# Altium PCB CET-124-120W_pnp.PcbDoc (part 1 of 2)
Units mm, origin at the board's own origin, x right, y up, seen from the top; angles counter-clockwise.
Board outline 250 x 140 mm, 2 copper layers (Top Layer, Bottom Layer); 186 components, 165 nets, 1267 pads, 0 vias.
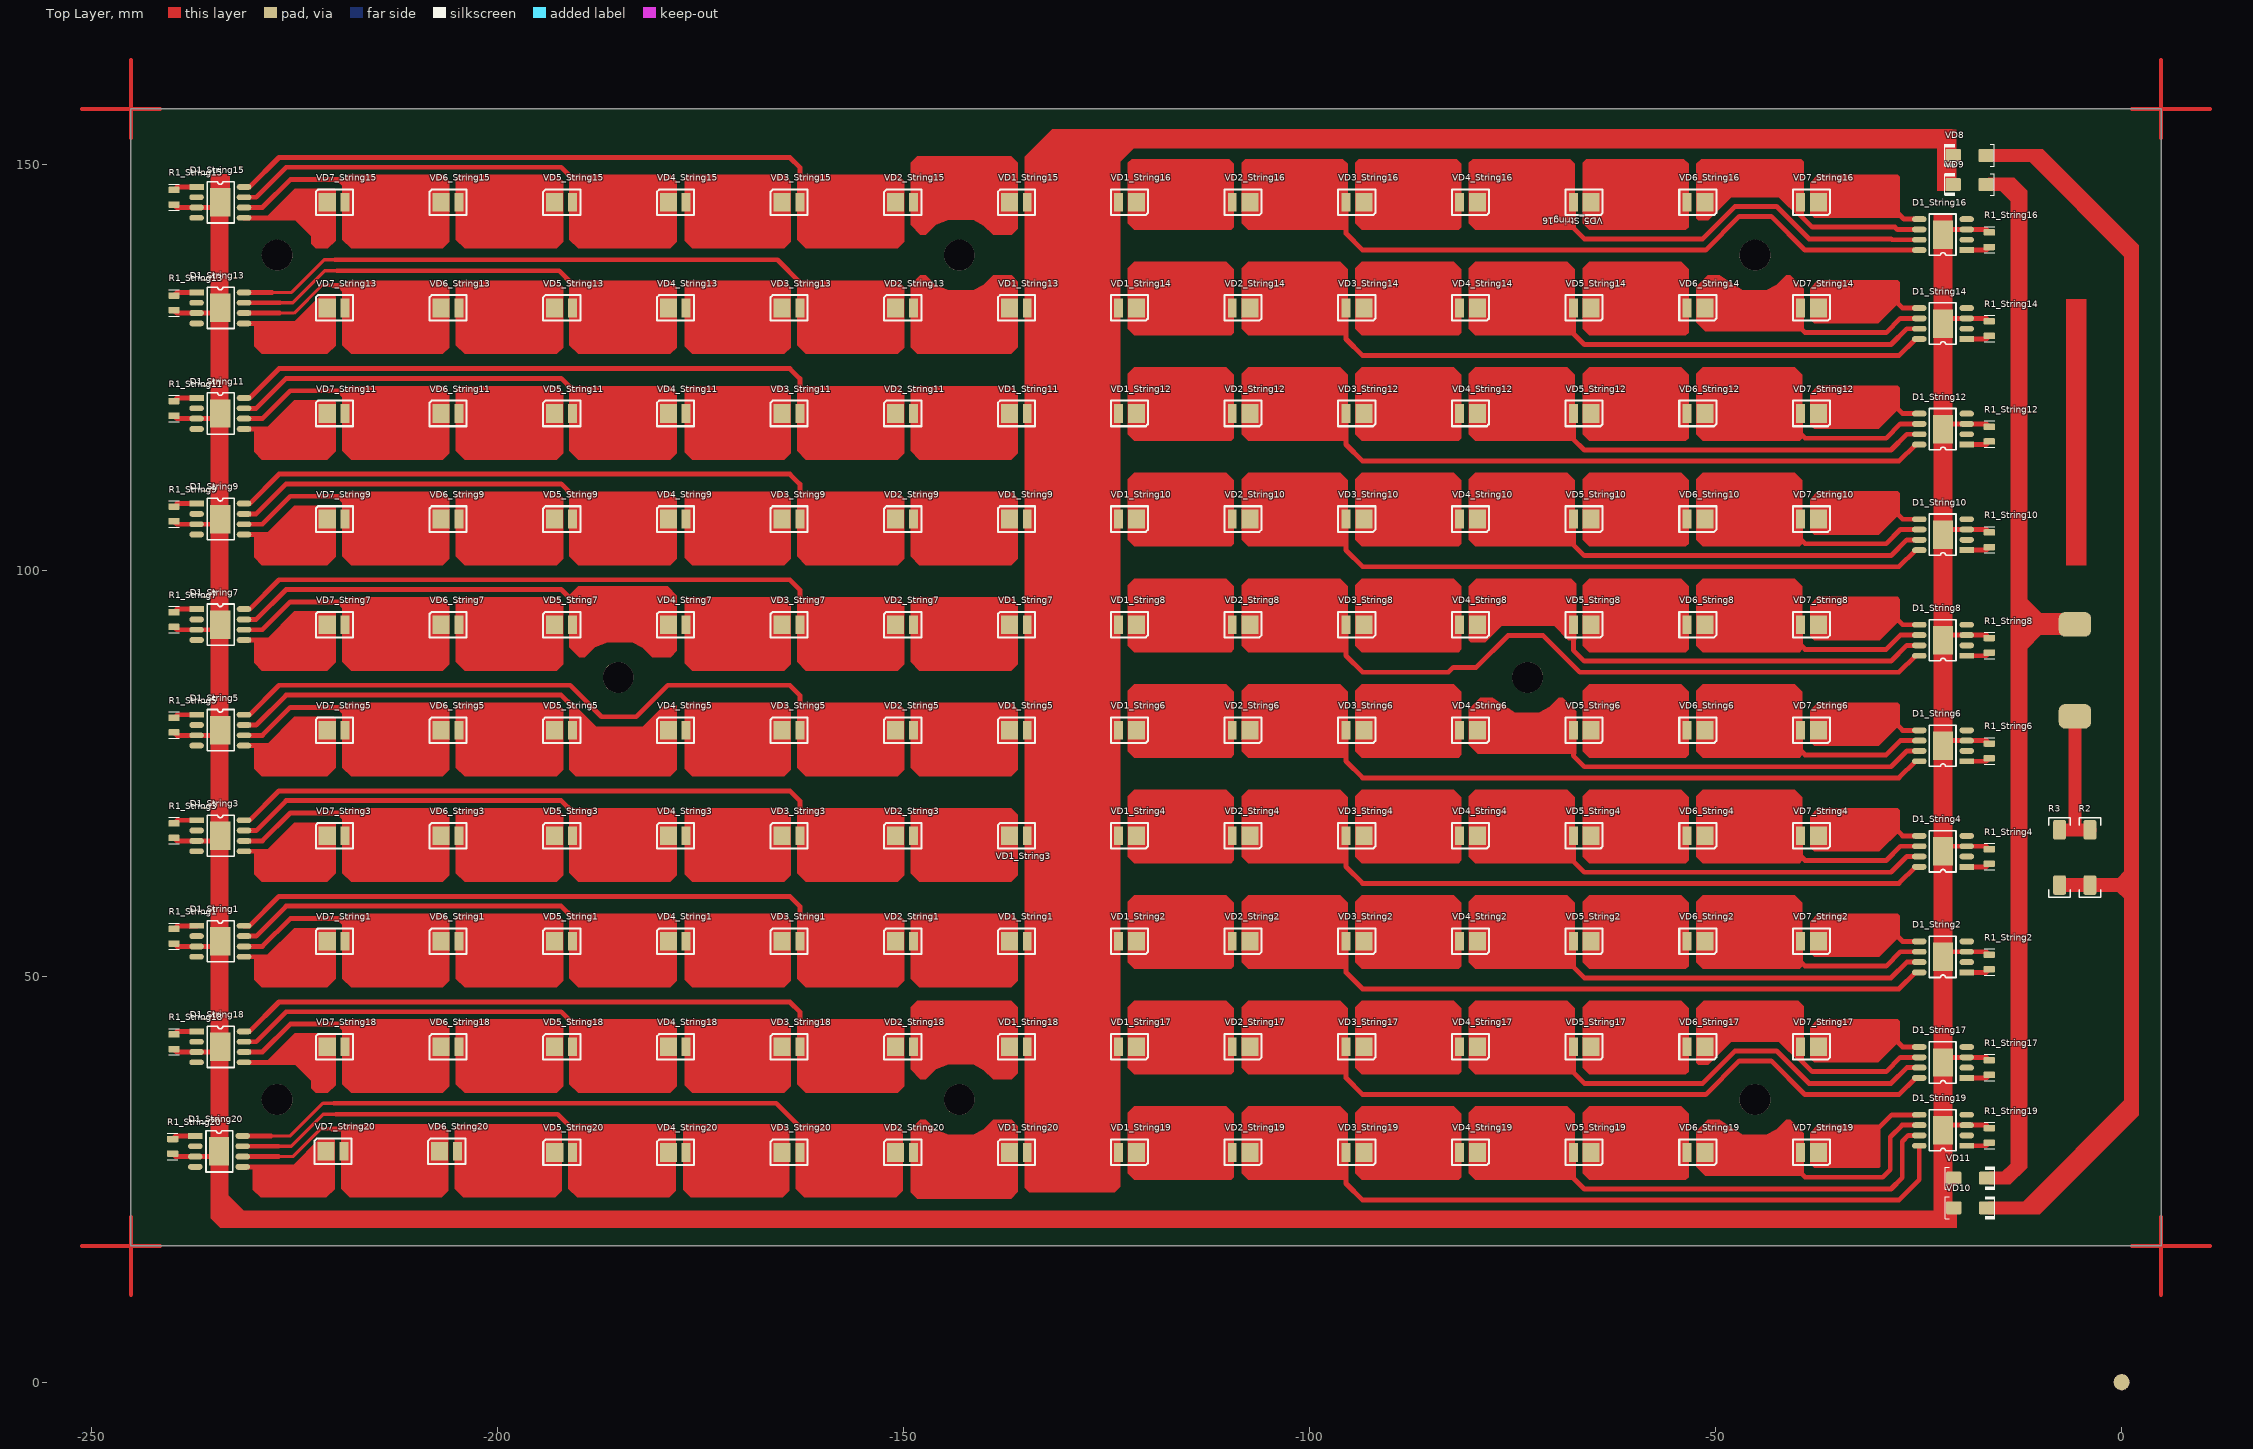
[diagram p0: Top Layer view]
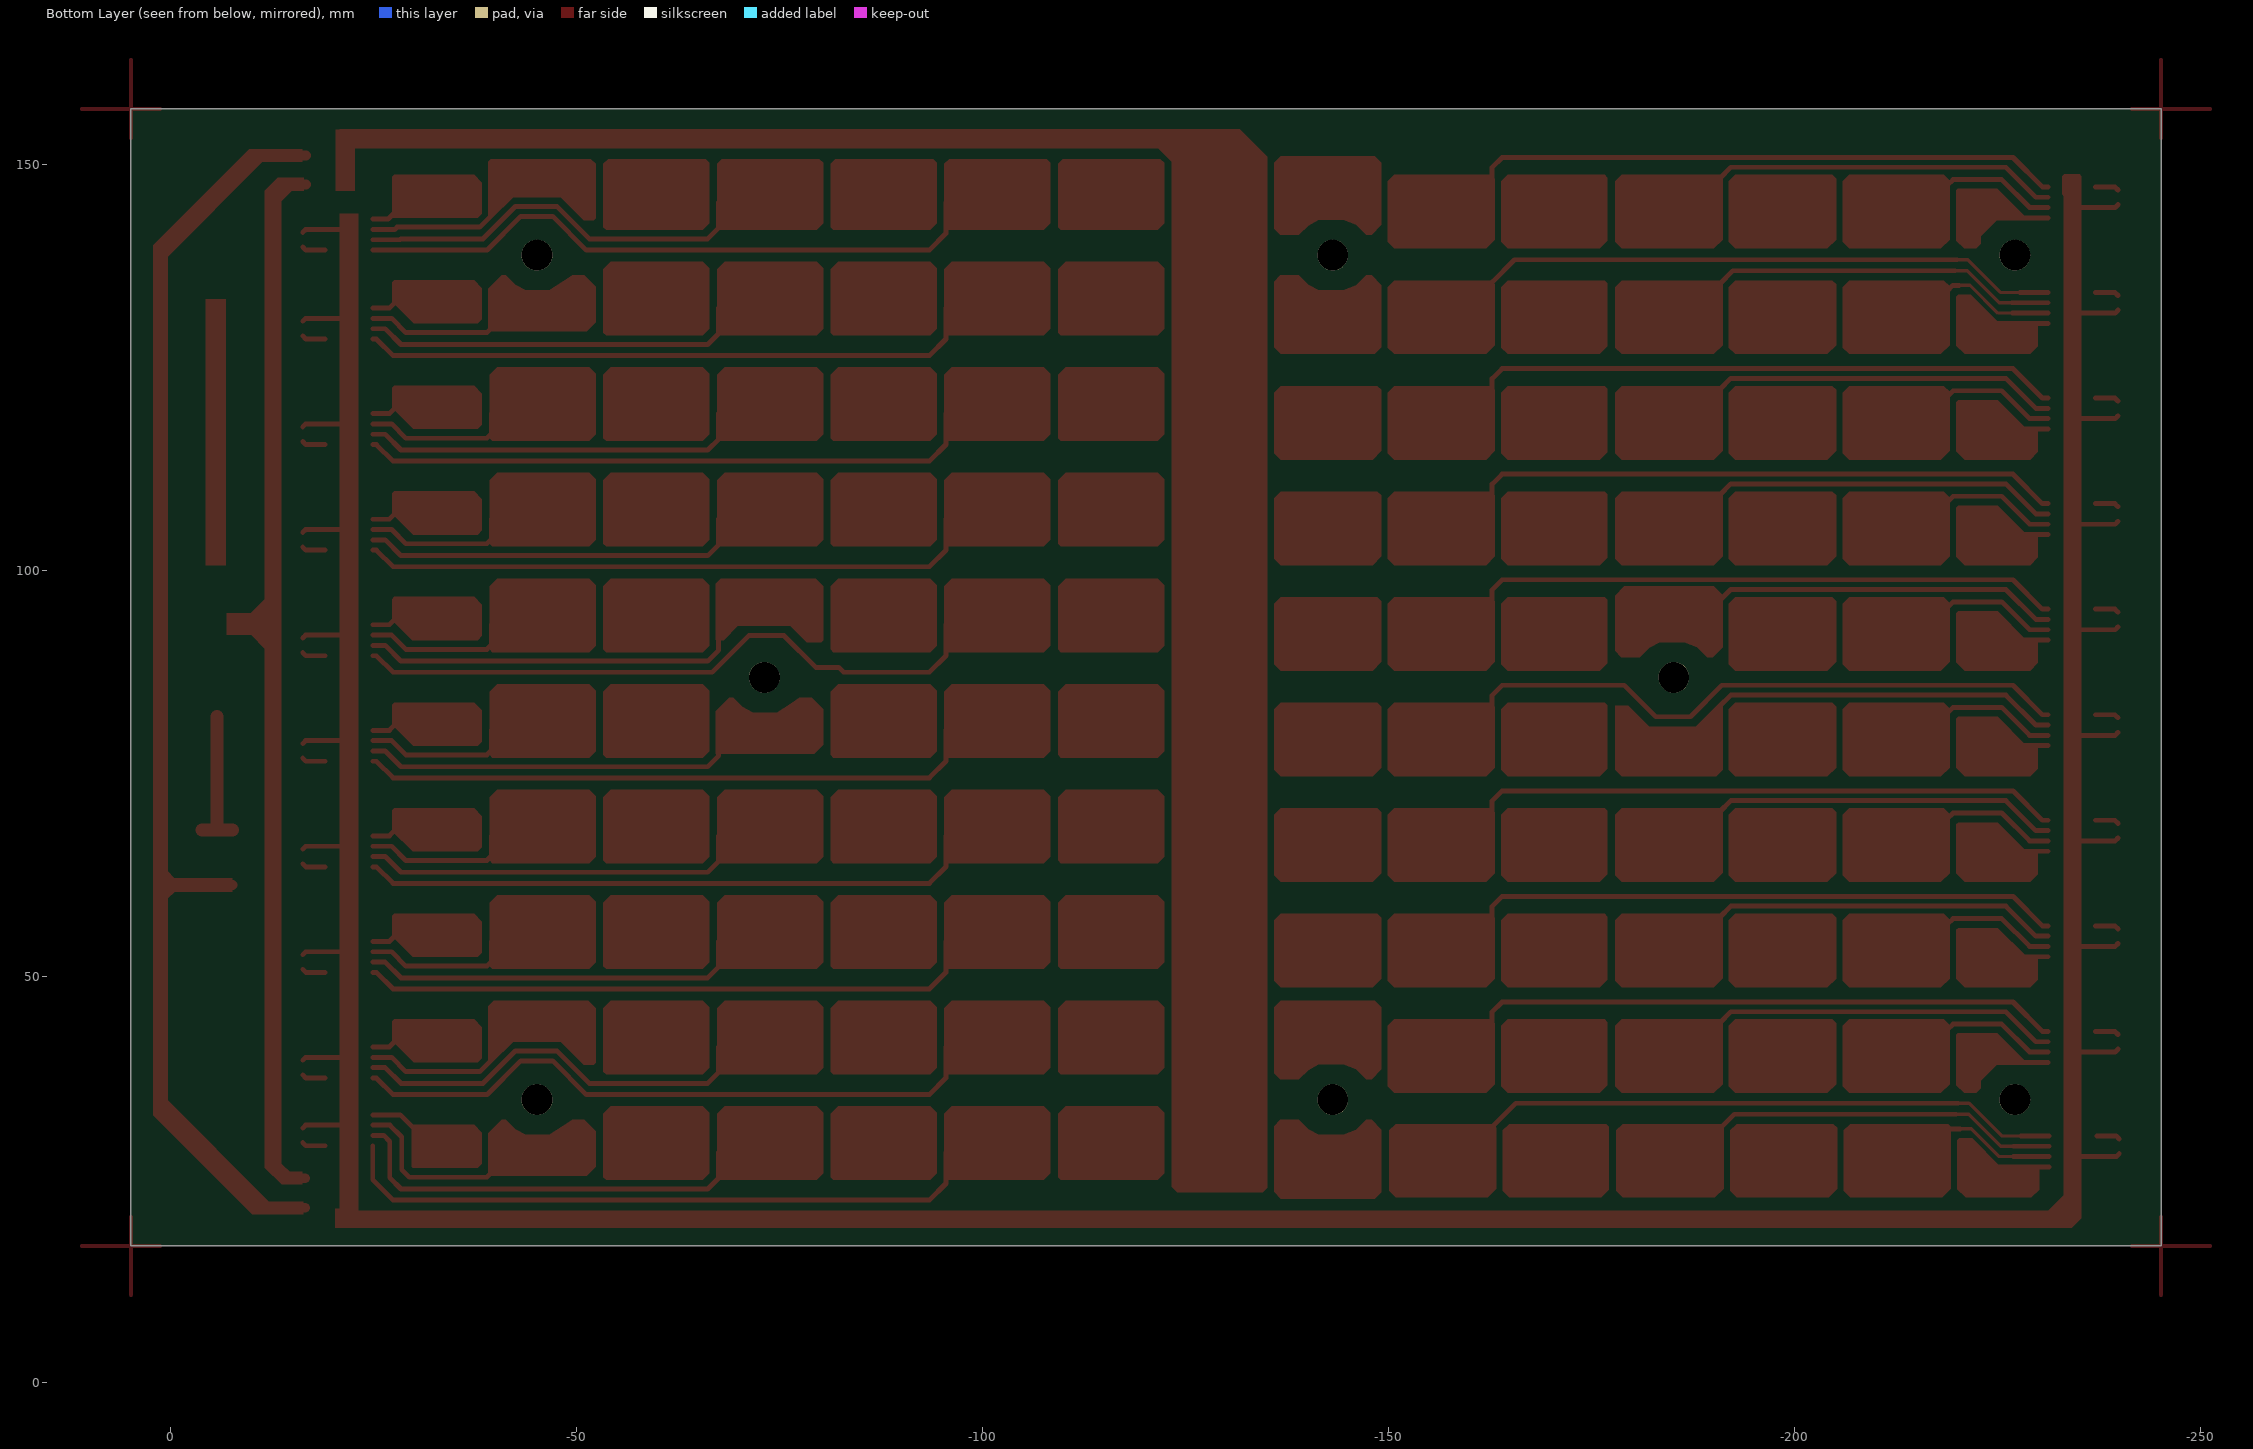
[diagram p1: Bottom Layer view, seen from below]
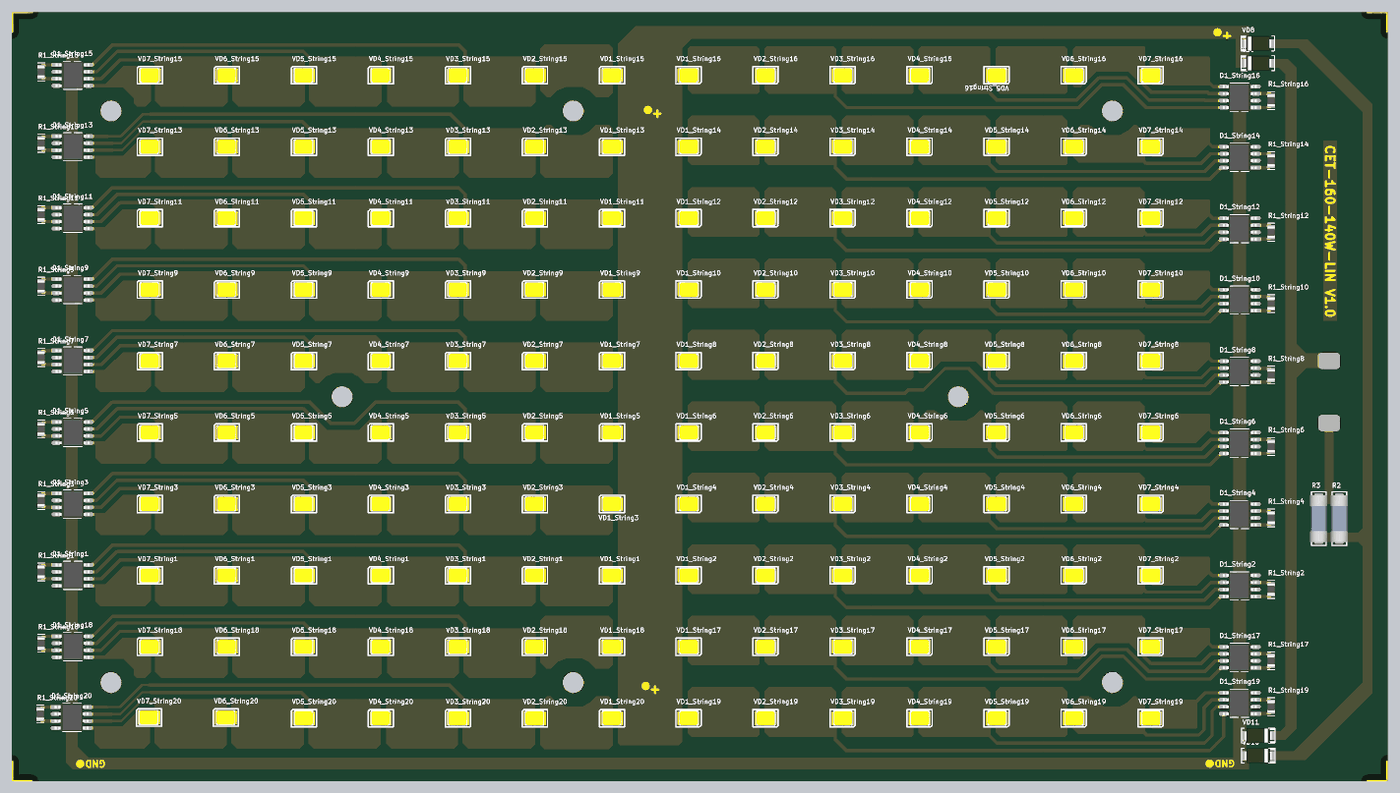
[diagram p3: 3D render of the assembled board from above, using the file's embedded part models]

## Layer stack, top to bottom
Top Solder: solder mask 0.0102, Solder Resist, Dk 3.5
Top Layer: signal copper 0.0356
Dielectric 1: dielectric 0.32, FR-4, Dk 4.8
Bottom Layer: signal copper 0.0356
Bottom Solder: solder mask 0.0102, Solder Resist, Dk 3.5

## Board outline
4.85,156.8 4.85,16.8 -245.15,16.8 -245.15,156.8

## Design rules (kind name [scope] priority, off if disabled: settings)
Clearance [InNet('LED+') vs InNet('GND')] p1: gap=0.8
Clearance Clearance_1 [InNetClass('string')] p2: gap=0.55
Clearance Clearance_2 [All] p3: gap=0.254
ComponentClearance [All] p1: gap=0 collisioncheckmode=3 verticalgap=0 showdistances=FALSE
PolygonConnect [All] p1: connectstyle=Relief reliefconductorwidth=0.254 reliefentries=4 polygonreliefangle="90 Angle" airgapwidth=0.254
RoutingVias [All] p1: holewidth=0.711 width=1.27 viastyle="Through Hole" minholewidth=0.711 minwidth=1.27 maxholewidth=0.711 maxwidth=1.27
SolderMaskExpansion [All] p1: expansion=0.102
Width [All] p1: maxlimit=5 minlimit=0.1 preferedwidth=0.254
29 further rules are at their usual default settings.

## Classes and differential pairs
component class String7: D1_String7 R1_String7 VD1_String7 VD2_String7 VD3_String7 VD4_String7 VD5_String7 VD6_String7 VD7_String7
component class String6: D1_String6 R1_String6 VD1_String6 VD2_String6 VD3_String6 VD4_String6 VD5_String6 VD6_String6 VD7_String6
component class String1: D1_String1 R1_String1 VD1_String1 VD2_String1 VD3_String1 VD4_String1 VD5_String1 VD6_String1 VD7_String1
component class String2: D1_String2 R1_String2 VD1_String2 VD2_String2 VD3_String2 VD4_String2 VD5_String2 VD6_String2 VD7_String2
component class String3: D1_String3 R1_String3 VD1_String3 VD2_String3 VD3_String3 VD4_String3 VD5_String3 VD6_String3 VD7_String3
component class String4: D1_String4 R1_String4 VD1_String4 VD2_String4 VD3_String4 VD4_String4 VD5_String4 VD6_String4 VD7_String4
component class String5: D1_String5 R1_String5 VD1_String5 VD2_String5 VD3_String5 VD4_String5 VD5_String5 VD6_String5 VD7_String5
component class String8: D1_String8 R1_String8 VD1_String8 VD2_String8 VD3_String8 VD4_String8 VD5_String8 VD6_String8 VD7_String8
component class CET-160-120W-LIN_main: R2 R3 VD8 VD9 VD10 VD11
component class String9: D1_String9 R1_String9 VD1_String9 VD2_String9 VD3_String9 VD4_String9 VD5_String9 VD6_String9 VD7_String9
component class String10: D1_String10 R1_String10 VD1_String10 VD2_String10 VD3_String10 VD4_String10 VD5_String10 VD6_String10 VD7_String10
component class String11: D1_String11 R1_String11 VD1_String11 VD2_String11 VD3_String11 VD4_String11 VD5_String11 VD6_String11 VD7_String11
component class String12: D1_String12 R1_String12 VD1_String12 VD2_String12 VD3_String12 VD4_String12 VD5_String12 VD6_String12 VD7_String12
component class String13: D1_String13 R1_String13 VD1_String13 VD2_String13 VD3_String13 VD4_String13 VD5_String13 VD6_String13 VD7_String13
component class String14: D1_String14 R1_String14 VD1_String14 VD2_String14 VD3_String14 VD4_String14 VD5_String14 VD6_String14 VD7_String14
component class String15: D1_String15 R1_String15 VD1_String15 VD2_String15 VD3_String15 VD4_String15 VD5_String15 VD6_String15 VD7_String15
component class String16: D1_String16 R1_String16 VD1_String16 VD2_String16 VD3_String16 VD4_String16 VD5_String16 VD6_String16 VD7_String16
channel class CET-160-120W-LIN: String1 String2 String3 String4 String5 String6 String7 String8 String9 String10 String11 String12 String13 String14 String15 String16
component class String17: D1_String17 R1_String17 VD1_String17 VD2_String17 VD3_String17 VD4_String17 VD5_String17 VD6_String17 VD7_String17
component class String18: D1_String18 R1_String18 VD1_String18 VD2_String18 VD3_String18 VD4_String18 VD5_String18 VD6_String18 VD7_String18
component class String19: D1_String19 R1_String19 VD1_String19 VD2_String19 VD3_String19 VD4_String19 VD5_String19 VD6_String19 VD7_String19
component class String20: D1_String20 R1_String20 VD1_String20 VD2_String20 VD3_String20 VD4_String20 VD5_String20 VD6_String20 VD7_String20

## Components (designator, comment, footprint, x,y, rotation, side; value= is the part's Value field where it differs from the comment)
D1_String1 "BP5136H" "SOIC8 pad" -234.15,54.3 r270 top (schematic designator D1)
D1_String2 "BP5136H" "SOIC8 pad" -22,52.375 r90 top (schematic designator D1)
D1_String3 "BP5136H" "SOIC8 pad" -234.15,67.3 r270 top (schematic designator D1)
D1_String4 "BP5136H" "SOIC8 pad" -22,65.375 r90 top (schematic designator D1)
D1_String5 "BP5136H" "SOIC8 pad" -234.15,80.3 r270 top (schematic designator D1)
D1_String6 "BP5136H" "SOIC8 pad" -22,78.375 r90 top (schematic designator D1)
D1_String7 "BP5136H" "SOIC8 pad" -234.15,93.3 r270 top (schematic designator D1)
D1_String8 "BP5136H" "SOIC8 pad" -22,91.375 r90 top (schematic designator D1)
D1_String9 "BP5136H" "SOIC8 pad" -234.15,106.3 r270 top (schematic designator D1)
D1_String10 "BP5136H" "SOIC8 pad" -22,104.375 r90 top (schematic designator D1)
D1_String11 "BP5136H" "SOIC8 pad" -234.15,119.3 r270 top (schematic designator D1)
D1_String12 "BP5136H" "SOIC8 pad" -22,117.375 r90 top (schematic designator D1)
D1_String13 "BP5136H" "SOIC8 pad" -234.15,132.3 r270 top (schematic designator D1)
D1_String14 "BP5136H" "SOIC8 pad" -22,130.375 r90 top (schematic designator D1)
D1_String15 "BP5136H" "SOIC8 pad" -234.15,145.3 r270 top (schematic designator D1)
D1_String16 "BP5136H" "SOIC8 pad" -22,141.325 r90 top (schematic designator D1)
D1_String17 "BP5136H" "SOIC8 pad" -22,39.375 r90 top (schematic designator D1)
D1_String18 "BP5136H" "SOIC8 pad" -234.15,41.3 r270 top (schematic designator D1)
D1_String19 "BP5136H" "SOIC8 pad" -22,31.025 r90 top (schematic designator D1)
D1_String20 "BP5136H" "SOIC8 pad" -234.31,28.425 r270 top (schematic designator D1)
R1_String1 "R2012_30R" R0805 -239.85,54.925 r270 top (schematic designator R1)
R1_String2 "R2012_30R" R0805 -16.3,51.75 r90 top (schematic designator R1)
R1_String3 "R2012_30R" R0805 -239.85,67.925 r270 top (schematic designator R1)
R1_String4 "R2012_30R" R0805 -16.3,64.75 r90 top (schematic designator R1)
R1_String5 "R2012_30R" R0805 -239.85,80.925 r270 top (schematic designator R1)
R1_String6 "R2012_30R" R0805 -16.3,77.75 r90 top (schematic designator R1)
R1_String7 "R2012_30R" R0805 -239.85,93.925 r270 top (schematic designator R1)
R1_String8 "R2012_30R" R0805 -16.3,90.75 r90 top (schematic designator R1)
R1_String9 "R2012_30R" R0805 -239.85,106.925 r270 top (schematic designator R1)
R1_String10 "R2012_30R" R0805 -16.3,103.75 r90 top (schematic designator R1)
R1_String11 "R2012_30R" R0805 -239.85,119.925 r270 top (schematic designator R1)
R1_String12 "R2012_30R" R0805 -16.3,116.75 r90 top (schematic designator R1)
R1_String13 "R2012_30R" R0805 -239.85,132.925 r270 top (schematic designator R1)
R1_String14 "R2012_30R" R0805 -16.3,129.75 r90 top (schematic designator R1)
R1_String15 "R2012_30R" R0805 -239.85,145.925 r270 top (schematic designator R1)
R1_String16 "R2012_30R" R0805 -16.3,140.7 r90 top (schematic designator R1)
R1_String17 "R2012_30R" R0805 -16.3,38.75 r90 top (schematic designator R1)
R1_String18 "R2012_30R" R0805 -239.85,41.925 r270 top (schematic designator R1)
R1_String19 "R2012_30R" R0805 -16.3,30.4 r90 top (schematic designator R1)
R1_String20 "R2012_30R" R0805 -240.01,29.05 r270 top (schematic designator R1)
R2 "MKNP" MKNP -3.909,64.625 r270 top
R3 "MKNP" MKNP -7.65,64.625 r270 top
VD1_String1 "LED2835" 2835 -136.15,54.3 r0 top (schematic designator VD1)
VD1_String2 "LED2835" 2835 -122.15,54.3 r180 top (schematic designator VD1)
VD1_String3 "LED2835" 2835 -136.15,67.3 r0 top (schematic designator VD1)
VD1_String4 "LED2835" 2835 -122.15,67.3 r180 top (schematic designator VD1)
VD1_String5 "LED2835" 2835 -136.15,80.3 r0 top (schematic designator VD1)
VD1_String6 "LED2835" 2835 -122.15,80.3 r180 top (schematic designator VD1)
VD1_String7 "LED2835" 2835 -136.15,93.3 r0 top (schematic designator VD1)
VD1_String8 "LED2835" 2835 -122.15,93.3 r180 top (schematic designator VD1)
VD1_String9 "LED2835" 2835 -136.15,106.3 r0 top (schematic designator VD1)
VD1_String10 "LED2835" 2835 -122.15,106.3 r180 top (schematic designator VD1)
VD1_String11 "LED2835" 2835 -136.15,119.3 r0 top (schematic designator VD1)
VD1_String12 "LED2835" 2835 -122.15,119.3 r180 top (schematic designator VD1)
VD1_String13 "LED2835" 2835 -136.15,132.3 r0 top (schematic designator VD1)
VD1_String14 "LED2835" 2835 -122.15,132.3 r180 top (schematic designator VD1)
VD1_String15 "LED2835" 2835 -136.15,145.3 r0 top (schematic designator VD1)
VD1_String16 "LED2835" 2835 -122.15,145.3 r180 top (schematic designator VD1)
VD1_String17 "LED2835" 2835 -122.15,41.3 r180 top (schematic designator VD1)
VD1_String18 "LED2835" 2835 -136.15,41.3 r0 top (schematic designator VD1)
VD1_String19 "LED2835" 2835 -122.15,28.3 r180 top (schematic designator VD1)
VD1_String20 "LED2835" 2835 -136.15,28.3 r0 top (schematic designator VD1)
VD2_String1 "LED2835" 2835 -150.15,54.3 r0 top (schematic designator VD2)
VD2_String2 "LED2835" 2835 -108.15,54.3 r180 top (schematic designator VD2)
VD2_String3 "LED2835" 2835 -150.15,67.3 r0 top (schematic designator VD2)
VD2_String4 "LED2835" 2835 -108.15,67.3 r180 top (schematic designator VD2)
VD2_String5 "LED2835" 2835 -150.15,80.3 r0 top (schematic designator VD2)
VD2_String6 "LED2835" 2835 -108.15,80.3 r180 top (schematic designator VD2)
VD2_String7 "LED2835" 2835 -150.15,93.3 r0 top (schematic designator VD2)
VD2_String8 "LED2835" 2835 -108.15,93.3 r180 top (schematic designator VD2)
VD2_String9 "LED2835" 2835 -150.15,106.3 r0 top (schematic designator VD2)
VD2_String10 "LED2835" 2835 -108.15,106.3 r180 top (schematic designator VD2)
VD2_String11 "LED2835" 2835 -150.15,119.3 r0 top (schematic designator VD2)
VD2_String12 "LED2835" 2835 -108.15,119.3 r180 top (schematic designator VD2)
VD2_String13 "LED2835" 2835 -150.15,132.3 r0 top (schematic designator VD2)
VD2_String14 "LED2835" 2835 -108.15,132.3 r180 top (schematic designator VD2)
VD2_String15 "LED2835" 2835 -150.15,145.3 r0 top (schematic designator VD2)
VD2_String16 "LED2835" 2835 -108.15,145.3 r180 top (schematic designator VD2)
VD2_String17 "LED2835" 2835 -108.15,41.3 r180 top (schematic designator VD2)
VD2_String18 "LED2835" 2835 -150.15,41.3 r0 top (schematic designator VD2)
VD2_String19 "LED2835" 2835 -108.15,28.3 r180 top (schematic designator VD2)
VD2_String20 "LED2835" 2835 -150.15,28.3 r0 top (schematic designator VD2)
VD3_String1 "LED2835" 2835 -164.15,54.3 r0 top (schematic designator VD3)
VD3_String2 "LED2835" 2835 -94.15,54.3 r180 top (schematic designator VD3)
VD3_String3 "LED2835" 2835 -164.15,67.3 r0 top (schematic designator VD3)
VD3_String4 "LED2835" 2835 -94.15,67.3 r180 top (schematic designator VD3)
VD3_String5 "LED2835" 2835 -164.15,80.3 r0 top (schematic designator VD3)
VD3_String6 "LED2835" 2835 -94.15,80.3 r180 top (schematic designator VD3)
VD3_String7 "LED2835" 2835 -164.15,93.3 r0 top (schematic designator VD3)
VD3_String8 "LED2835" 2835 -94.15,93.3 r180 top (schematic designator VD3)
VD3_String9 "LED2835" 2835 -164.15,106.3 r0 top (schematic designator VD3)
VD3_String10 "LED2835" 2835 -94.15,106.3 r180 top (schematic designator VD3)
VD3_String11 "LED2835" 2835 -164.15,119.3 r0 top (schematic designator VD3)
VD3_String12 "LED2835" 2835 -94.15,119.3 r180 top (schematic designator VD3)
VD3_String13 "LED2835" 2835 -164.15,132.3 r0 top (schematic designator VD3)
VD3_String14 "LED2835" 2835 -94.15,132.3 r180 top (schematic designator VD3)
VD3_String15 "LED2835" 2835 -164.15,145.3 r0 top (schematic designator VD3)
VD3_String16 "LED2835" 2835 -94.15,145.3 r180 top (schematic designator VD3)
VD3_String17 "LED2835" 2835 -94.15,41.3 r180 top (schematic designator VD3)
VD3_String18 "LED2835" 2835 -164.15,41.3 r0 top (schematic designator VD3)
VD3_String19 "LED2835" 2835 -94.15,28.3 r180 top (schematic designator VD3)
VD3_String20 "LED2835" 2835 -164.15,28.3 r0 top (schematic designator VD3)
VD4_String1 "LED2835" 2835 -178.15,54.3 r0 top (schematic designator VD4)
VD4_String2 "LED2835" 2835 -80.15,54.3 r180 top (schematic designator VD4)
VD4_String3 "LED2835" 2835 -178.15,67.3 r0 top (schematic designator VD4)
VD4_String4 "LED2835" 2835 -80.15,67.3 r180 top (schematic designator VD4)
VD4_String5 "LED2835" 2835 -178.15,80.3 r0 top (schematic designator VD4)
VD4_String6 "LED2835" 2835 -80.15,80.3 r180 top (schematic designator VD4)
VD4_String7 "LED2835" 2835 -178.15,93.3 r0 top (schematic designator VD4)
VD4_String8 "LED2835" 2835 -80.15,93.3 r180 top (schematic designator VD4)
VD4_String9 "LED2835" 2835 -178.15,106.3 r0 top (schematic designator VD4)
VD4_String10 "LED2835" 2835 -80.15,106.3 r180 top (schematic designator VD4)
VD4_String11 "LED2835" 2835 -178.15,119.3 r0 top (schematic designator VD4)
VD4_String12 "LED2835" 2835 -80.15,119.3 r180 top (schematic designator VD4)
VD4_String13 "LED2835" 2835 -178.15,132.3 r0 top (schematic designator VD4)
VD4_String14 "LED2835" 2835 -80.15,132.3 r180 top (schematic designator VD4)
VD4_String15 "LED2835" 2835 -178.15,145.3 r0 top (schematic designator VD4)
VD4_String16 "LED2835" 2835 -80.15,145.3 r180 top (schematic designator VD4)
VD4_String17 "LED2835" 2835 -80.15,41.3 r180 top (schematic designator VD4)
VD4_String18 "LED2835" 2835 -178.15,41.3 r0 top (schematic designator VD4)
VD4_String19 "LED2835" 2835 -80.15,28.3 r180 top (schematic designator VD4)
VD4_String20 "LED2835" 2835 -178.15,28.3 r0 top (schematic designator VD4)
VD5_String1 "LED2835" 2835 -192.15,54.3 r0 top (schematic designator VD5)
VD5_String2 "LED2835" 2835 -66.15,54.3 r180 top (schematic designator VD5)
VD5_String3 "LED2835" 2835 -192.15,67.3 r0 top (schematic designator VD5)
VD5_String4 "LED2835" 2835 -66.15,67.3 r180 top (schematic designator VD5)
VD5_String5 "LED2835" 2835 -192.15,80.3 r0 top (schematic designator VD5)
VD5_String6 "LED2835" 2835 -66.15,80.3 r180 top (schematic designator VD5)
VD5_String7 "LED2835" 2835 -192.15,93.3 r0 top (schematic designator VD5)
VD5_String8 "LED2835" 2835 -66.15,93.3 r180 top (schematic designator VD5)
VD5_String9 "LED2835" 2835 -192.15,106.3 r0 top (schematic designator VD5)
VD5_String10 "LED2835" 2835 -66.15,106.3 r180 top (schematic designator VD5)
VD5_String11 "LED2835" 2835 -192.15,119.3 r0 top (schematic designator VD5)
VD5_String12 "LED2835" 2835 -66.15,119.3 r180 top (schematic designator VD5)
VD5_String13 "LED2835" 2835 -192.15,132.3 r0 top (schematic designator VD5)
VD5_String14 "LED2835" 2835 -66.15,132.3 r180 top (schematic designator VD5)
VD5_String15 "LED2835" 2835 -192.15,145.3 r0 top (schematic designator VD5)
VD5_String16 "LED2835" 2835 -66.15,145.3 r180 top (schematic designator VD5)
VD5_String17 "LED2835" 2835 -66.15,41.3 r180 top (schematic designator VD5)
VD5_String18 "LED2835" 2835 -192.15,41.3 r0 top (schematic designator VD5)
VD5_String19 "LED2835" 2835 -66.15,28.3 r180 top (schematic designator VD5)
VD5_String20 "LED2835" 2835 -192.135,28.3 r0 top (schematic designator VD5)
VD6_String1 "LED2835" 2835 -206.15,54.3 r0 top (schematic designator VD6)
VD6_String2 "LED2835" 2835 -52.15,54.3 r180 top (schematic designator VD6)
VD6_String3 "LED2835" 2835 -206.15,67.3 r0 top (schematic designator VD6)
VD6_String4 "LED2835" 2835 -52.15,67.3 r180 top (schematic designator VD6)
VD6_String5 "LED2835" 2835 -206.15,80.3 r0 top (schematic designator VD6)
VD6_String6 "LED2835" 2835 -52.15,80.3 r180 top (schematic designator VD6)
VD6_String7 "LED2835" 2835 -206.15,93.3 r0 top (schematic designator VD6)
VD6_String8 "LED2835" 2835 -52.15,93.3 r180 top (schematic designator VD6)
VD6_String9 "LED2835" 2835 -206.15,106.3 r0 top (schematic designator VD6)
VD6_String10 "LED2835" 2835 -52.15,106.3 r180 top (schematic designator VD6)
VD6_String11 "LED2835" 2835 -206.15,119.3 r0 top (schematic designator VD6)
VD6_String12 "LED2835" 2835 -52.15,119.3 r180 top (schematic designator VD6)
VD6_String13 "LED2835" 2835 -206.15,132.3 r0 top (schematic designator VD6)
VD6_String14 "LED2835" 2835 -52.15,132.3 r180 top (schematic designator VD6)
VD6_String15 "LED2835" 2835 -206.15,145.3 r0 top (schematic designator VD6)
VD6_String16 "LED2835" 2835 -52.15,145.3 r180 top (schematic designator VD6)
VD6_String17 "LED2835" 2835 -52.15,41.3 r180 top (schematic designator VD6)
VD6_String18 "LED2835" 2835 -206.15,41.3 r0 top (schematic designator VD6)
VD6_String19 "LED2835" 2835 -52.15,28.3 r180 top (schematic designator VD6)
VD6_String20 "LED2835" 2835 -206.31,28.425 r0 top (schematic designator VD6)
VD7_String1 "LED2835" 2835 -220.15,54.3 r0 top (schematic designator VD7)
VD7_String2 "LED2835" 2835 -38.15,54.3 r180 top (schematic designator VD7)
VD7_String3 "LED2835" 2835 -220.15,67.3 r0 top (schematic designator VD7)
VD7_String4 "LED2835" 2835 -38.15,67.3 r180 top (schematic designator VD7)
VD7_String5 "LED2835" 2835 -220.15,80.3 r0 top (schematic designator VD7)
VD7_String6 "LED2835" 2835 -38.15,80.3 r180 top (schematic designator VD7)
VD7_String7 "LED2835" 2835 -220.15,93.3 r0 top (schematic designator VD7)
VD7_String8 "LED2835" 2835 -38.15,93.3 r180 top (schematic designator VD7)
VD7_String9 "LED2835" 2835 -220.15,106.3 r0 top (schematic designator VD7)
VD7_String10 "LED2835" 2835 -38.15,106.3 r180 top (schematic designator VD7)
VD7_String11 "LED2835" 2835 -220.15,119.3 r0 top (schematic designator VD7)
VD7_String12 "LED2835" 2835 -38.15,119.3 r180 top (schematic designator VD7)
VD7_String13 "LED2835" 2835 -220.15,132.3 r0 top (schematic designator VD7)
VD7_String14 "LED2835" 2835 -38.15,132.3 r180 top (schematic designator VD7)
VD7_String15 "LED2835" 2835 -220.15,145.3 r0 top (schematic designator VD7)
VD7_String16 "LED2835" 2835 -38.15,145.3 r180 top (schematic designator VD7)
VD7_String17 "LED2835" 2835 -38.15,41.3 r180 top (schematic designator VD7)
VD7_String18 "LED2835" 2835 -220.15,41.3 r0 top (schematic designator VD7)
VD7_String19 "LED2835" 2835 -38.15,28.3 r180 top (schematic designator VD7)
VD7_String20 "LED2835" 2835 -220.31,28.425 r0 top (schematic designator VD7)
VD8 "ES1J" DO-214ACW -18.725,151.075 r0 top
VD9 "ES1J" DO-214ACW -18.725,147.5 r0 top
VD10 "ES1J" DO-214ACW -18.65,21.475 r180 top
VD11 "ES1J" DO-214ACW -18.65,25.125 r180 top

## Footprints (in the part's own frame and the unit in brackets; to place one, negate y for a bottom-side part, rotate by r counter-clockwise, add the part's x,y. Pads: shape width x height; smd on the part's side, far side on the other; paste and mask are expansions set on the pad)
2835 [mm] "1"
  round 0.1 on Mech15: 0(0.225,-1.15) 0(0.225,1.15) 0(0.825,-1.15) 0(0.825,1.15)
  rect 1.1x2.3 smd paste-0.5 mask+0.1: 1(1.375,0)
  rect 2.1x2.3 smd mask+0.1: 2(-0.825,0)
  silkscreen extent -2.24,-1.58 2.33,1.57, body extent -1.77,-1.4 1.74,1.4, height 0.82
DO-214ACW [mm] "3"
  rrect20% 1.9x1.6 smd mask+0.05: 1(-2.025,0) 2(2.025,0)
  silkscreen extent -3.05,-1.42 3.05,1.42, body extent -2.51,-1.35 2.49,1.35, height 2.15
MKNP [mm] "MELF KNP 0.25W"
  rrect30% 2.4x1.6 smd: 1(-3.4,0) 2(3.4,0)
  silkscreen extent -4.9,-1.33 4.9,1.33, body extent -4.25,-1.55 4.25,1.55, height 3.1
R0805 [mm] "4"
  rrect30% 0.8x1.4 smd: 1(-0.9,0) 2(0.9,0)
  silkscreen extent -1.63,-0.65 1.62,0.65, body extent -1.05,-0.67 1.05,0.67, height 0.52
"SOIC8 pad" [mm] "4"
  rect 0.72x1.8 smd: 1(-1.905,-2.921)
  oval 0.72x1.8 smd: 2(-0.635,-2.921) 3(0.635,-2.921) 4(1.905,-2.921) 5(1.905,2.921) 6(0.635,2.921) 7(-0.635,2.921) 8(-1.905,2.921)
  rect 3.5x2.5 smd: 3(0,0)
  silkscreen extent -2.54,-1.6 2.54,1.7, body extent -2.5,-3.1 2.5,3.1, height 1.85

## Part data
R1_String1 R1_String2 R1_String3 R1_String4 R1_String5 R1_String6 R1_String7 R1_String8 R1_String9 R1_String10 R1_String11 R1_String12 R1_String13 R1_String14 R1_String15 R1_String16 R1_String17 R1_String18 R1_String19 R1_String20: library part "Резистор 0.125 Ватт"
R2 R3: library part "Резистор 0.25 Ватт"
VD1_String1 VD1_String2 VD1_String3 VD1_String4 VD1_String5 VD1_String6 VD1_String7 VD1_String8 VD1_String9 VD1_String10 VD1_String11 VD1_String12 VD1_String13 VD1_String14 VD1_String15 VD1_String16 VD1_String17 VD1_String18 VD1_String19 VD1_String20 VD2_String1 VD2_String2 VD2_String3 VD2_String4 VD2_String5 VD2_String6 VD2_String7 VD2_String8 VD2_String9 VD2_String10 VD2_String11 VD2_String12 VD2_String13 VD2_String14 VD2_String15 VD2_String16 VD2_String17 VD2_String18 VD2_String19 VD2_String20 VD3_String1 VD3_String2 VD3_String3 VD3_String4 VD3_String5 VD3_String6 VD3_String7 VD3_String8 VD3_String9 VD3_String10 VD3_String11 VD3_String12 VD3_String13 VD3_String14 VD3_String15 VD3_String16 VD3_String17 VD3_String18 VD3_String19 VD3_String20 VD4_String1 VD4_String2 VD4_String3 VD4_String4 VD4_String5 VD4_String6 VD4_String7 VD4_String8 VD4_String9 VD4_String10 VD4_String11 VD4_String12 VD4_String13 VD4_String14 VD4_String15 VD4_String16 VD4_String17 VD4_String18 VD4_String19 VD4_String20 VD5_String1 VD5_String2 VD5_String3 VD5_String4 VD5_String5 VD5_String6 VD5_String7 VD5_String8 VD5_String9 VD5_String10 VD5_String11 VD5_String12 VD5_String13 VD5_String14 VD5_String15 VD5_String16 VD5_String17 VD5_String18 VD5_String19 VD5_String20 VD6_String1 VD6_String2 VD6_String3 VD6_String4 VD6_String5 VD6_String6 VD6_String7 VD6_String8 VD6_String9 VD6_String10 VD6_String11 VD6_String12 VD6_String13 VD6_String14 VD6_String15 VD6_String16 VD6_String17 VD6_String18 VD6_String19 VD6_String20 VD7_String1 VD7_String2 VD7_String3 VD7_String4 VD7_String5 VD7_String6 VD7_String7 VD7_String8 VD7_String9 VD7_String10 VD7_String11 VD7_String12 VD7_String13 VD7_String14 VD7_String15 VD7_String16 VD7_String17 VD7_String18 VD7_String19 VD7_String20: library part Светодиод
VD8 VD9 VD10 VD11: library part Диод

## Free pads (board coordinates)
  round 2 smd mask+2: 2(0,0)
  round 3.8 hole 3.8: 4(-227.15,34.8) 4(-227.15,138.8) 4(-185.15,86.8) 4(-143.15,34.8) 4(-143.15,138.8) 4(-73.15,86.8) 4(-45.15,34.8) 4(-45.15,138.8)
  rrect50% 4x3 smd: 6(-5.75,82.01) 6(-5.75,93.335)
  round 1.524 on Mech1: 17(-240.01,29.05) 17(-239.85,41.925) 17(-239.85,54.925) 17(-239.85,67.925) 17(-239.85,80.925) 17(-239.85,93.925) 17(-239.85,106.925) 17(-239.85,119.925) 17(-239.85,132.925) 17(-239.85,145.925) 17(-234.15,145.3) 17(-220.15,145.3) 17(-206.15,145.3) 17(-192.15,145.3) 17(-178.15,145.3) 17(-164.15,145.3) 17(-150.15,145.3) 17(-136.15,145.3) 17(-122.15,145.3) 17(-108.15,145.3) 17(-94.15,145.3) 17(-80.15,145.3) 17(-66.15,145.3) 17(-52.15,145.3) 17(-38.15,145.3) 17(-16.3,38.75) 17(-16.3,51.75) 17(-16.3,64.75) 17(-16.3,77.75) 17(-16.3,90.75) 17(-16.3,103.75) 17(-16.3,116.75) 17(-16.3,129.75) 17(-16.3,140.7) 17(-16.3,30.4) 18(-234.15,132.3) 18(-220.15,132.3) 18(-206.15,132.3) 18(-192.15,132.3) 18(-178.15,132.3) 18(-164.15,132.3) 18(-150.15,132.3) 18(-136.15,132.3) 18(-122.15,132.3) 18(-108.15,132.3) 18(-94.15,132.3) 18(-80.15,132.3) 18(-66.15,132.3) 18(-52.15,132.3) 18(-38.15,132.3) 18(-22,31.025) 18(-22,39.375) 18(-22,52.375) 18(-22,65.375) 18(-22,78.375) 18(-22,91.375) 18(-22,104.375) 18(-22,117.375) 18(-22,130.375) 19(-234.15,119.3) 19(-220.15,119.3) 19(-206.15,119.3) 19(-192.15,119.3) 19(-178.15,119.3) 19(-164.15,119.3) 19(-150.15,119.3) 19(-136.15,119.3) 19(-122.15,119.3) 19(-108.15,119.3) 19(-94.15,119.3) 19(-80.15,119.3) 19(-66.15,119.3) 19(-52.15,119.3) 19(-38.15,119.3) 20(-234.15,106.3) 20(-220.15,106.3) 20(-206.15,106.3) 20(-192.15,106.3) 20(-178.15,106.3) 20(-164.15,106.3) 20(-150.15,106.3) 20(-136.15,106.3) 20(-122.15,106.3) 20(-108.15,106.3) 20(-94.15,106.3) 20(-80.15,106.3) 20(-66.15,106.3) 20(-52.15,106.3) 20(-38.15,106.3) 21(-234.15,93.3) 21(-220.15,93.3) 21(-206.15,93.3) 21(-192.15,93.3) 21(-178.15,93.3) 21(-164.15,93.3) 21(-150.15,93.3) 21(-136.15,93.3) 21(-122.15,93.3) 21(-108.15,93.3) 21(-94.15,93.3) 21(-80.15,93.3) 21(-66.15,93.3) 21(-52.15,93.3) 21(-38.15,93.3) 22(-234.15,80.3) 22(-220.15,80.3) 22(-206.15,80.3) 22(-192.15,80.3) 22(-178.15,80.3) 22(-164.15,80.3) 22(-150.15,80.3) 22(-136.15,80.3) 22(-122.15,80.3) 22(-108.15,80.3) 22(-94.15,80.3) 22(-80.15,80.3) 22(-66.15,80.3) 22(-52.15,80.3) 22(-38.15,80.3) 23(-234.15,67.3) 23(-220.15,67.3) 23(-206.15,67.3) 23(-192.15,67.3) 23(-178.15,67.3) 23(-164.15,67.3) 23(-150.15,67.3) 23(-136.15,67.3) 23(-122.15,67.3) 23(-108.15,67.3) 23(-94.15,67.3) 23(-80.15,67.3) 23(-66.15,67.3) 23(-52.15,67.3) 23(-38.15,67.3) 24(-234.15,54.3) 24(-220.15,54.3) 24(-206.15,54.3) 24(-192.15,54.3) 24(-178.15,54.3) 24(-164.15,54.3) 24(-150.15,54.3) 24(-136.15,54.3) 24(-122.15,54.3) 24(-108.15,54.3) 24(-94.15,54.3) 24(-80.15,54.3) 24(-66.15,54.3) 24(-52.15,54.3) 24(-38.15,54.3) 25(-234.15,41.3) 25(-220.15,41.3) 25(-206.15,41.3) 25(-192.15,41.3) 25(-178.15,41.3) 25(-164.15,41.3) 25(-150.15,41.3) 25(-136.15,41.3) 25(-122.15,41.3) 25(-108.15,41.3) 25(-94.15,41.3) 25(-80.15,41.3) 25(-66.15,41.3) 25(-52.15,41.3) 25(-38.15,41.3) 26(-234.15,28.3) 26(-220.15,28.3) 26(-206.15,28.3) 26(-192.15,28.3) 26(-178.15,28.3) 26(-164.15,28.3) 26(-150.15,28.3) 26(-136.15,28.3) 26(-122.15,28.3) 26(-108.15,28.3) 26(-94.15,28.3) 26(-80.15,28.3) 26(-66.15,28.3) 26(-52.15,28.3) 26(-38.15,28.3)
  round 1.524 on Top Solder: 17(-232.747,20) 17(-130,34.175) 17(-129.575,138.975) 17(-27.475,20.05) 17(-26.05,153.1)

## Nets (pads, with @x,y where several pads share a name; then routed paths per layer and width w, separated by ;. In a path a pad name is that pad's centre, name@x,y a point inside that pad or via, vN(x,y) a via of type N, cw(c..) or ccw(c..) an arc to the next point about the centre after c; other vN are vias at no path point)
220L: pad.6@-5.75,82.01 R2.1 R3.1 | length 17.8
  Top Layer w1.6: R3.1@-7.65,68.025 -5.85,68.025 ; pad.6@-5.75,82.01 -5.75,68.125 -5.85,68.025 ; R2.1@-3.909,68.025 -5.85,68.025
220N: pad.6@-5.75,93.335 VD9.2 VD11.1 | length 133.7
  Top Layer w1.2: VD9.2@-16.7,147.5 -14.125,147.5 -13.1,146.475 -13.1,93.025 ; VD11.1@-16.625,25.125 -14.65,25.125 -13.1,26.675 -13.1,93.025 ; pad.6@-7.5,93.335 -12.79,93.335 -13.1,93.025
GND: D1_String1.3 D1_String2.3 D1_String3.3 D1_String4.3 D1_String5.3 D1_String6.3 D1_String7.3 D1_String8.3 D1_String9.3 D1_String10.3 D1_String11.3 D1_String12.3 D1_String13.3 D1_String14.3 D1_String15.3 D1_String16.3 D1_String17.3 D1_String18.3 D1_String19.3 D1_String20.3 R1_String1.2 R1_String2.2 R1_String3.2 R1_String4.2 R1_String5.2 R1_String6.2 R1_String7.2 R1_String8.2 R1_String9.2 R1_String10.2 R1_String11.2 R1_String12.2 R1_String13.2 R1_String14.2 R1_String15.2 R1_String16.2 R1_String17.2 R1_String18.2 R1_String19.2 R1_String20.2 VD10.2 VD11.2 | length 114.2
  Top Layer w0.6: R1_String20.2@-240.01,28.15 -239.65,27.79 D1_String20.3@-237.231,27.79 -234.945,27.79 D1_String20.3@-234.31,28.425 ; R1_String18.2@-239.85,41.025 -239.49,40.665 D1_String18.3@-237.071,40.665 -234.785,40.665 D1_String18.3@-234.15,41.3 ; R1_String1.2@-239.85,54.025 -239.49,53.665 D1_String1.3@-237.071,53.665 -234.785,53.665 D1_String1.3@-234.15,54.3 ; R1_String3.2@-239.85,67.025 -239.49,66.665 D1_String3.3@-237.071,66.665 -234.785,66.665 D1_String3.3@-234.15,67.3 ; R1_String5.2@-239.85,80.025 -239.49,79.665 D1_String5.3@-237.071,79.665 -234.785,79.665 D1_String5.3@-234.15,80.3 ; R1_String7.2@-239.85,93.025 -239.49,92.665 D1_String7.3@-237.071,92.665 -234.785,92.665 D1_String7.3@-234.15,93.3 ; R1_String9.2@-239.85,106.025 -239.49,105.665 D1_String9.3@-237.071,105.665 -234.785,105.665 D1_String9.3@-234.15,106.3 ; R1_String11.2@-239.85,119.025 -239.49,118.665 D1_String11.3@-237.071,118.665 -234.785,118.665 D1_String11.3@-234.15,119.3 ; R1_String13.2@-239.85,132.025 -239.49,131.665 D1_String13.3@-237.071,131.665 -234.785,131.665 D1_String13.3@-234.15,132.3 ; R1_String15.2@-239.85,145.025 -239.49,144.665 D1_String15.3@-237.071,144.665 -234.785,144.665 D1_String15.3@-234.15,145.3 ; D1_String16.3@-22,141.325 -21.365,141.96 D1_String16.3@-19.079,141.96 -16.66,141.96 R1_String16.2@-16.3,141.6 ; D1_String19.3@-21.365,31.66 D1_String19.3@-19.079,31.66 -16.66,31.66 R1_String19.2@-16.3,31.3 ; D1_String17.3@-21.365,40.01 D1_String17.3@-19.079,40.01 -16.66,40.01 R1_String17.2@-16.3,39.65 ; D1_String2.3@-21.365,53.01 D1_String2.3@-19.079,53.01 -16.66,53.01 R1_String2.2@-16.3,52.65 ; D1_String4.3@-21.365,66.01 D1_String4.3@-19.079,66.01 -16.66,66.01 R1_String4.2@-16.3,65.65 ; D1_String6.3@-21.365,79.01 D1_String6.3@-19.079,79.01 -16.66,79.01 R1_String6.2@-16.3,78.65 ; D1_String8.3@-21.365,92.01 D1_String8.3@-19.079,92.01 -16.66,92.01 R1_String8.2@-16.3,91.65 ; D1_String10.3@-21.365,105.01 D1_String10.3@-19.079,105.01 -16.66,105.01 R1_String10.2@-16.3,104.65 ; D1_String12.3@-21.365,118.01 D1_String12.3@-19.079,118.01 -16.66,118.01 R1_String12.2@-16.3,117.65 ; D1_String14.3@-21.365,131.01 D1_String14.3@-19.079,131.01 -16.66,131.01 R1_String14.2@-16.3,130.65
LED+: VD1_String1.1 VD1_String2.1 VD1_String3.1 VD1_String4.1 VD1_String5.1 VD1_String6.1 VD1_String7.1 VD1_String8.1 VD1_String9.1 VD1_String10.1 VD1_String11.1 VD1_String12.1 VD1_String13.1 VD1_String14.1 VD1_String15.1 VD1_String16.1 VD1_String17.1 VD1_String18.1 VD1_String19.1 VD1_String20.1 VD8.1 VD9.1
NetD1_String1_1: D1_String1.1 R1_String1.1 | length 2.9
  Top Layer w0.6: R1_String1.1@-239.85,55.825 -239.47,56.205 D1_String1.1@-237.071,56.205
NetD1_String2_1: D1_String2.1 R1_String2.1 | length 2.9
  Top Layer w0.6: D1_String2.1@-19.079,50.47 -16.68,50.47 R1_String2.1@-16.3,50.85
NetD1_String3_1: D1_String3.1 R1_String3.1 | length 2.9
  Top Layer w0.6: R1_String3.1@-239.85,68.825 -239.47,69.205 D1_String3.1@-237.071,69.205
NetD1_String4_1: D1_String4.1 R1_String4.1 | length 2.9
  Top Layer w0.6: D1_String4.1@-19.079,63.47 -16.68,63.47 R1_String4.1@-16.3,63.85
NetD1_String5_1: D1_String5.1 R1_String5.1 | length 2.9
  Top Layer w0.6: R1_String5.1@-239.85,81.825 -239.47,82.205 D1_String5.1@-237.071,82.205
NetD1_String6_1: D1_String6.1 R1_String6.1 | length 2.9
  Top Layer w0.6: D1_String6.1@-19.079,76.47 -16.68,76.47 R1_String6.1@-16.3,76.85
NetD1_String7_1: D1_String7.1 R1_String7.1 | length 2.9
  Top Layer w0.6: R1_String7.1@-239.85,94.825 -239.47,95.205 D1_String7.1@-237.071,95.205
NetD1_String8_1: D1_String8.1 R1_String8.1 | length 2.9
  Top Layer w0.6: D1_String8.1@-19.079,89.47 -16.68,89.47 R1_String8.1@-16.3,89.85
NetD1_String9_1: D1_String9.1 R1_String9.1 | length 2.9
  Top Layer w0.6: R1_String9.1@-239.85,107.825 -239.47,108.205 D1_String9.1@-237.071,108.205
NetD1_String10_1: D1_String10.1 R1_String10.1 | length 2.9
  Top Layer w0.6: D1_String10.1@-19.079,102.47 -16.68,102.47 R1_String10.1@-16.3,102.85
NetD1_String11_1: D1_String11.1 R1_String11.1 | length 2.9
  Top Layer w0.6: R1_String11.1@-239.85,120.825 -239.47,121.205 D1_String11.1@-237.071,121.205
NetD1_String12_1: D1_String12.1 R1_String12.1 | length 2.9
  Top Layer w0.6: D1_String12.1@-19.079,115.47 -16.68,115.47 R1_String12.1@-16.3,115.85
NetD1_String13_1: D1_String13.1 R1_String13.1 | length 2.9
  Top Layer w0.6: R1_String13.1@-239.85,133.825 -239.47,134.205 D1_String13.1@-237.071,134.205
NetD1_String14_1: D1_String14.1 R1_String14.1 | length 2.9
  Top Layer w0.6: D1_String14.1@-19.079,128.47 -16.68,128.47 R1_String14.1@-16.3,128.85
NetD1_String15_1: D1_String15.1 R1_String15.1 | length 2.9
  Top Layer w0.6: R1_String15.1@-239.85,146.825 -239.47,147.205 D1_String15.1@-237.071,147.205
NetD1_String16_1: D1_String16.1 R1_String16.1 | length 2.9
  Top Layer w0.6: D1_String16.1@-19.079,139.42 -16.68,139.42 R1_String16.1@-16.3,139.8
NetD1_String17_1: D1_String17.1 R1_String17.1 | length 2.9
  Top Layer w0.6: D1_String17.1@-19.079,37.47 -16.68,37.47 R1_String17.1@-16.3,37.85
NetD1_String18_1: D1_String18.1 R1_String18.1 | length 2.9
  Top Layer w0.6: R1_String18.1@-239.85,42.825 -239.47,43.205 D1_String18.1@-237.071,43.205
NetD1_String19_1: D1_String19.1 R1_String19.1 | length 2.9
  Top Layer w0.6: D1_String19.1@-19.079,29.12 -16.68,29.12 R1_String19.1@-16.3,29.5
NetD1_String20_1: D1_String20.1 R1_String20.1 | length 2.9
  Top Layer w0.6: R1_String20.1@-240.01,29.95 -239.63,30.33 D1_String20.1@-237.231,30.33
NetR2_2: R2.2 R3.2 VD8.2 VD10.1 | length 162.3
  Top Layer w1.2: VD8.2@-16.7,151.075 -9.875,151.075 1.55,139.65 1.55,61.125 ; VD10.1@-16.625,21.475 -12.1,21.475 1.55,35.125 1.55,61.125 ; R3.2@-7.65,61.225 R2.2@-3.909,61.225 ; -5.659,61.225 1.45,61.225 1.55,61.125
NetVD1_String1_2: VD1_String1.2 VD2_String1.1
NetVD1_String2_2: VD1_String2.2 VD2_String2.1
NetVD1_String3_2: VD1_String3.2 VD2_String3.1
NetVD1_String4_2: VD1_String4.2 VD2_String4.1
NetVD1_String5_2: VD1_String5.2 VD2_String5.1
NetVD1_String6_2: VD1_String6.2 VD2_String6.1
NetVD1_String7_2: VD1_String7.2 VD2_String7.1
NetVD1_String8_2: VD1_String8.2 VD2_String8.1
NetVD1_String9_2: VD1_String9.2 VD2_String9.1
NetVD1_String10_2: VD1_String10.2 VD2_String10.1
NetVD1_String11_2: VD1_String11.2 VD2_String11.1
NetVD1_String12_2: VD1_String12.2 VD2_String12.1
NetVD1_String13_2: VD1_String13.2 VD2_String13.1
NetVD1_String14_2: VD1_String14.2 VD2_String14.1
NetVD1_String15_2: VD1_String15.2 VD2_String15.1
NetVD1_String16_2: VD1_String16.2 VD2_String16.1
NetVD1_String17_2: VD1_String17.2 VD2_String17.1
NetVD1_String18_2: VD1_String18.2 VD2_String18.1
NetVD1_String19_2: VD1_String19.2 VD2_String19.1
NetVD1_String20_2: VD1_String20.2 VD2_String20.1
NetVD3_String1_2: VD3_String1.2 VD4_String1.1
NetVD3_String2_2: VD3_String2.2 VD4_String2.1
NetVD3_String3_2: VD3_String3.2 VD4_String3.1
NetVD3_String4_2: VD3_String4.2 VD4_String4.1
NetVD3_String5_2: VD3_String5.2 VD4_String5.1
NetVD3_String6_2: VD3_String6.2 VD4_String6.1
NetVD3_String7_2: VD3_String7.2 VD4_String7.1
NetVD3_String8_2: VD3_String8.2 VD4_String8.1
NetVD3_String9_2: VD3_String9.2 VD4_String9.1
NetVD3_String10_2: VD3_String10.2 VD4_String10.1
NetVD3_String11_2: VD3_String11.2 VD4_String11.1
NetVD3_String12_2: VD3_String12.2 VD4_String12.1
NetVD3_String13_2: VD3_String13.2 VD4_String13.1
NetVD3_String14_2: VD3_String14.2 VD4_String14.1
NetVD3_String15_2: VD3_String15.2 VD4_String15.1
NetVD3_String16_2: VD3_String16.2 VD4_String16.1
NetVD3_String17_2: VD3_String17.2 VD4_String17.1
NetVD3_String18_2: VD3_String18.2 VD4_String18.1
NetVD3_String19_2: VD3_String19.2 VD4_String19.1
NetVD3_String20_2: VD3_String20.2 VD4_String20.1
NetVD5_String1_2: VD5_String1.2 VD6_String1.1
NetVD5_String2_2: VD5_String2.2 VD6_String2.1
NetVD5_String3_2: VD5_String3.2 VD6_String3.1
NetVD5_String4_2: VD5_String4.2 VD6_String4.1
NetVD5_String5_2: VD5_String5.2 VD6_String5.1
NetVD5_String6_2: VD5_String6.2 VD6_String6.1
NetVD5_String7_2: VD5_String7.2 VD6_String7.1
NetVD5_String8_2: VD5_String8.2 VD6_String8.1
NetVD5_String9_2: VD5_String9.2 VD6_String9.1
NetVD5_String10_2: VD5_String10.2 VD6_String10.1
NetVD5_String11_2: VD5_String11.2 VD6_String11.1
NetVD5_String12_2: VD5_String12.2 VD6_String12.1
NetVD5_String13_2: VD5_String13.2 VD6_String13.1
NetVD5_String14_2: VD5_String14.2 VD6_String14.1
NetVD5_String15_2: VD5_String15.2 VD6_String15.1
NetVD5_String16_2: VD5_String16.2 VD6_String16.1
NetVD5_String17_2: VD5_String17.2 VD6_String17.1
NetVD5_String18_2: VD5_String18.2 VD6_String18.1
NetVD5_String19_2: VD5_String19.2 VD6_String19.1
NetVD5_String20_2: VD5_String20.2 VD6_String20.1
S1_String1: D1_String1.8 VD2_String1.2 VD3_String1.1 | length 74.8
  Top Layer w0.6: D1_String1.8@-231.229,56.205 -230.545,56.205 -226.925,59.825 -164,59.825 -162.775,58.6 VD3_String1.1@-162.775,54.3
S1_String2: D1_String2.8 VD2_String2.2 VD3_String2.1 | length 76.1
  Top Layer w0.6: VD3_String2.1@-95.525,54.3 -95.525,50.475 -93.475,48.425 -51.225,48.425 -27.425,48.425 -25.38,50.47 D1_String2.8@-24.921,50.47
S1_String3: D1_String3.8 VD2_String3.2 VD3_String3.1 | length 74.8
  Top Layer w0.6: D1_String3.8@-231.229,69.205 -230.545,69.205 -226.925,72.825 -164,72.825 -162.775,71.6 VD3_String3.1@-162.775,67.3
S1_String4: D1_String4.8 VD2_String4.2 VD3_String4.1 | length 76.1
  Top Layer w0.6: VD3_String4.1@-95.525,67.3 -95.525,63.475 -93.475,61.425 -51.225,61.425 -27.425,61.425 -25.38,63.47 D1_String4.8@-24.921,63.47
S1_String5: D1_String5.8 VD2_String5.2 VD3_String5.1 | length 78
  Top Layer w0.6: D1_String5.8@-231.229,82.205 -230.545,82.205 -226.925,85.825 -191.075,85.825 -187.2,81.95 -182.925,81.95 -179.05,85.825 -164,85.825 -162.775,84.6 VD3_String5.1@-162.775,80.3
S1_String6: D1_String6.8 VD2_String6.2 VD3_String6.1 | length 76.1
  Top Layer w0.6: VD3_String6.1@-95.525,80.3 -95.525,76.475 -93.475,74.425 -51.225,74.425 -27.425,74.425 -25.38,76.47 D1_String6.8@-24.921,76.47
S1_String7: D1_String7.8 VD2_String7.2 VD3_String7.1 | length 74.8
  Top Layer w0.6: D1_String7.8@-231.229,95.205 -230.545,95.205 -226.925,98.825 -164,98.825 -162.775,97.6 VD3_String7.1@-162.775,93.3
S1_String8: D1_String8.8 VD2_String8.2 VD3_String8.1 | length 79.9
  Top Layer w0.6: VD3_String8.1@-95.525,93.3 -95.525,89.475 -93.475,87.425 -82.913,87.425 -82.313,88.025 -79.5,88.025 -75.575,91.95 -71.25,91.95 -66.725,87.425 -27.425,87.425 -25.38,89.47 D1_String8.8@-24.921,89.47
S1_String9: D1_String9.8 VD2_String9.2 VD3_String9.1 | length 74.8
  Top Layer w0.6: D1_String9.8@-231.229,108.205 -230.545,108.205 -226.925,111.825 -164,111.825 -162.775,110.6 VD3_String9.1@-162.775,106.3
S1_String10: D1_String10.8 VD2_String10.2 VD3_String10.1 | length 76.1
  Top Layer w0.6: VD3_String10.1@-95.525,106.3 -95.525,102.475 -93.475,100.425 -51.225,100.425 -27.425,100.425 -25.38,102.47 D1_String10.8@-24.921,102.47
S1_String11: D1_String11.8 VD2_String11.2 VD3_String11.1 | length 74.8
  Top Layer w0.6: D1_String11.8@-231.229,121.205 -230.545,121.205 -226.925,124.825 -164,124.825 -162.775,123.6 VD3_String11.1@-162.775,119.3
S1_String12: D1_String12.8 VD2_String12.2 VD3_String12.1 | length 76.1
  Top Layer w0.6: VD3_String12.1@-95.525,119.3 -95.525,115.475 -93.475,113.425 -51.225,113.425 -27.425,113.425 ; -27.425,113.425 -25.38,115.47 D1_String12.8@-24.921,115.47
S1_String13: D1_String13.8 VD2_String13.2 VD3_String13.1 | length 74.4
  Top Layer w0.4: -227.745,134.205 -225.37,134.205 -221.35,138.225 -220.025,138.225
  Top Layer w0.6: D1_String13.8@-231.229,134.205 -227.745,134.205 ; -220.025,138.225 -165.525,138.225 -162.775,135.475 VD3_String13.1@-162.775,132.3
S1_String14: D1_String14.8 VD2_String14.2 VD3_String14.1 | length 76.1
  Top Layer w0.6: VD3_String14.1@-95.525,132.3 -95.525,128.475 -93.475,126.425 -51.225,126.425 -27.425,126.425 -25.38,128.47 D1_String14.8@-24.921,128.47
S1_String15: D1_String15.8 VD2_String15.2 VD3_String15.1 | length 74.8
  Top Layer w0.6: D1_String15.8@-231.229,147.205 -230.545,147.205 -226.925,150.825 -164,150.825 -162.775,149.6 VD3_String15.1@-162.775,145.3
S1_String16: D1_String16.8 VD2_String16.2 VD3_String16.1 | length 78.7
  Top Layer w0.6: VD3_String16.1@-95.525,145.3 -95.525,141.475 -93.475,139.425 -51.225,139.425 -47.075,143.575 -43.15,143.575 -39,139.425 -24.926,139.425 D1_String16.8@-24.921,139.42
S1_String17: D1_String17.8 VD2_String17.2 VD3_String17.1 | length 79.6
  Top Layer w0.6: VD3_String17.1@-95.525,41.3 -95.525,37.475 -93.475,35.425 -51.225,35.425 -47.075,39.575 -43.15,39.575 -39,35.425 -27.425,35.425 -25.38,37.47 D1_String17.8@-24.921,37.47
S1_String18: D1_String18.8 VD2_String18.2 VD3_String18.1 | length 74.8
  Top Layer w0.6: D1_String18.8@-231.229,43.205 -230.545,43.205 -226.925,46.825 -164,46.825 -162.775,45.6 VD3_String18.1@-162.775,41.3
S1_String19: D1_String19.8 VD2_String19.2 VD3_String19.1 | length 80.5
  Top Layer w0.6: VD3_String19.1@-95.525,28.3 -95.525,24.475 -93.475,22.425 -27.425,22.425 -24.921,24.929 D1_String19.8@-24.921,29.12
S1_String20: D1_String20.8 VD2_String20.2 VD3_String20.1 | length 74.4
  Top Layer w0.4: -227.905,30.33 -225.53,30.33 -221.51,34.35 -220.185,34.35
  Top Layer w0.6: D1_String20.8@-231.389,30.33 -227.905,30.33 ; -220.185,34.35 -165.685,34.35 -162.935,31.6 VD3_String20.1@-162.935,28.425
S2_String1: D1_String1.7 VD4_String1.2 VD5_String1.1 | length 45.5
  Top Layer w0.6: D1_String1.7@-231.229,54.935 -229.74,54.935 -226.05,58.625 -192.175,58.625 -190.775,57.225 VD5_String1.1@-190.775,54.3
S2_String2: D1_String2.7 VD4_String2.2 VD5_String2.1 | length 47.1
  Top Layer w0.6: VD5_String2.1@-67.525,54.3 -67.525,51.15 -66.175,49.8 -51.6,49.8 -28.4,49.8 -26.46,51.74 D1_String2.7@-24.921,51.74
S2_String3: D1_String3.7 VD4_String3.2 VD5_String3.1 | length 45.5
  Top Layer w0.6: D1_String3.7@-231.229,67.935 -229.74,67.935 -226.05,71.625 -192.175,71.625 -190.775,70.225 VD5_String3.1@-190.775,67.3
S2_String4: D1_String4.7 VD4_String4.2 VD5_String4.1 | length 47.1
  Top Layer w0.6: VD5_String4.1@-67.525,67.3 -67.525,64.15 -66.175,62.8 -51.6,62.8 -28.4,62.8 -26.46,64.74 D1_String4.7@-24.921,64.74
S2_String5: D1_String5.7 VD4_String5.2 VD5_String5.1 | length 45.5
  Top Layer w0.6: D1_String5.7@-231.229,80.935 -229.74,80.935 -226.05,84.625 -192.175,84.625 -190.775,83.225 VD5_String5.1@-190.775,80.3